# Altium PCB DAQ-1-A.PcbDoc (part 2 of 2)
Units mil, origin at the board's own origin, x right, y up, seen from the top; angles counter-clockwise.
Board outline 1653.54 x 4488.19 mil, 2 copper layers (Top Layer, Bottom Layer); 58 components, 45 nets, 204 pads, 105 vias.
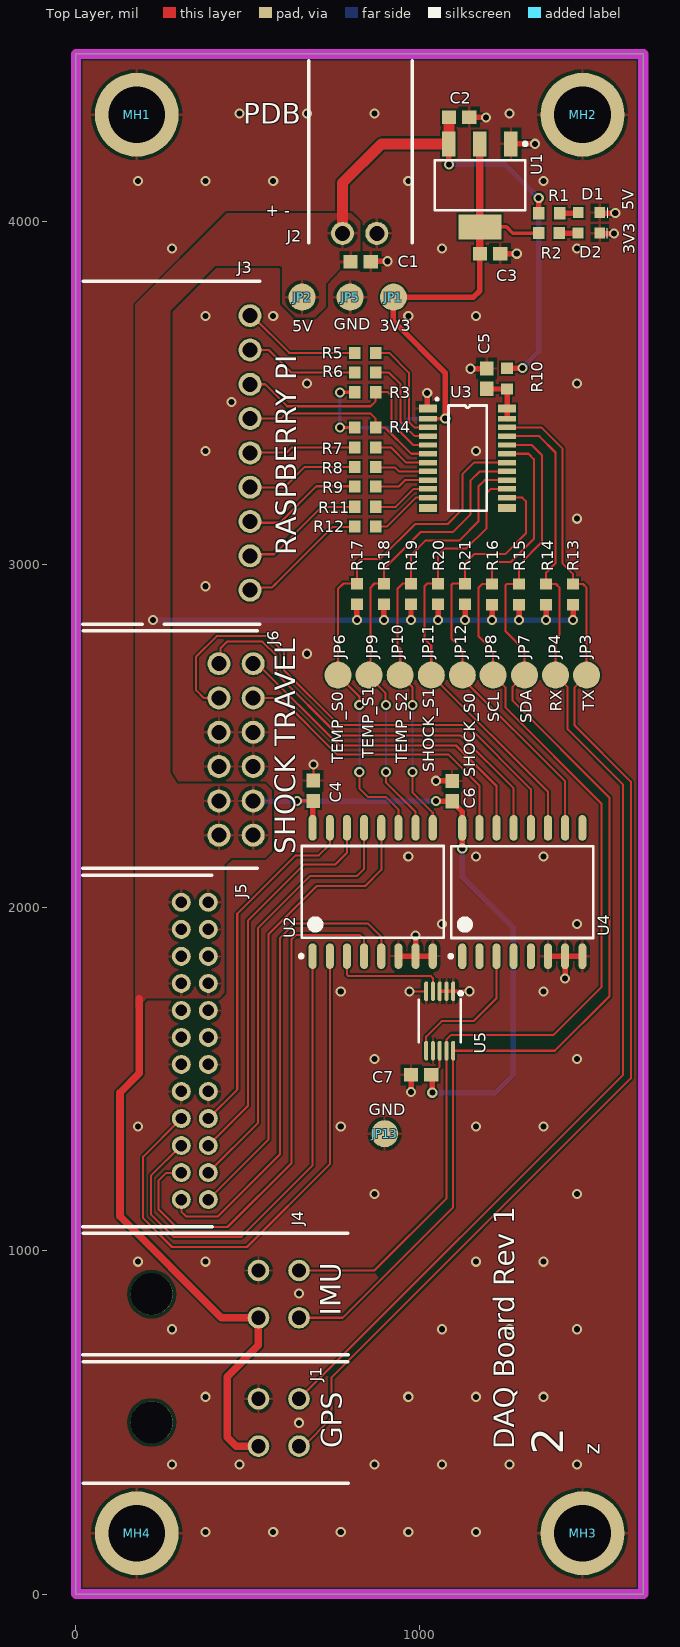
[diagram p0: Top Layer view]

## Silkscreen, mask and mechanical layers (free items; w line width, h text height) (continued)
Bottom Overlay: (continued)
  text "TEMP S2" at 446.56,3104.63 h34
  text "SHOCK S0" at 446.56,3006.2 h34
  text "SHOCK S1" at 446.56,2907.77 h34
  text "SHOCK" at 765.45,2647.93 h34
  text "GND" at 686.71,2435.33 h34
  text "5V" at 655.22,2242.42 h34
  text "5V" at 529.23,1872.34 h34
  text "GND" at 568.6,1557.38 h34
  text "TEMP" at 604.04,1242.42 h34
  text "GND" at 466.24,927.46 h34
  text "SDA" at 840.3,925.7 h34
  text "SCL" at 831.8,792.7 h34
  text "5V" at 466.24,781.79 h34
  text "GND" at 462.3,549.51 h34
  text "RX" at 808.76,545.57 h34
  text "DAQ Board Rev 1" at 1485.94,425.2 h59.06 r270
  text "5V" at 458.37,419.59 h34
  text "TX" at 808.76,411.71 h34
  text "z" at 1220.91,409.45 h78.74 r270
  text "2" at 1312.92,409.16 h157.48 r270
Board Outline:
  lines w10: 1653.54,0 1653.54,0
  lines w30: 0,0 0,4488.19 1653.54,4488.19 1653.54,0 0,0

## Dimensions
0,4488.19 to 0,0 on Drill Guide
0,4488.19 to 1653.54,4488.19 on Drill Guide